# EAGLE board 0402-capacitor-shunt (EAGLE 9.4.1)
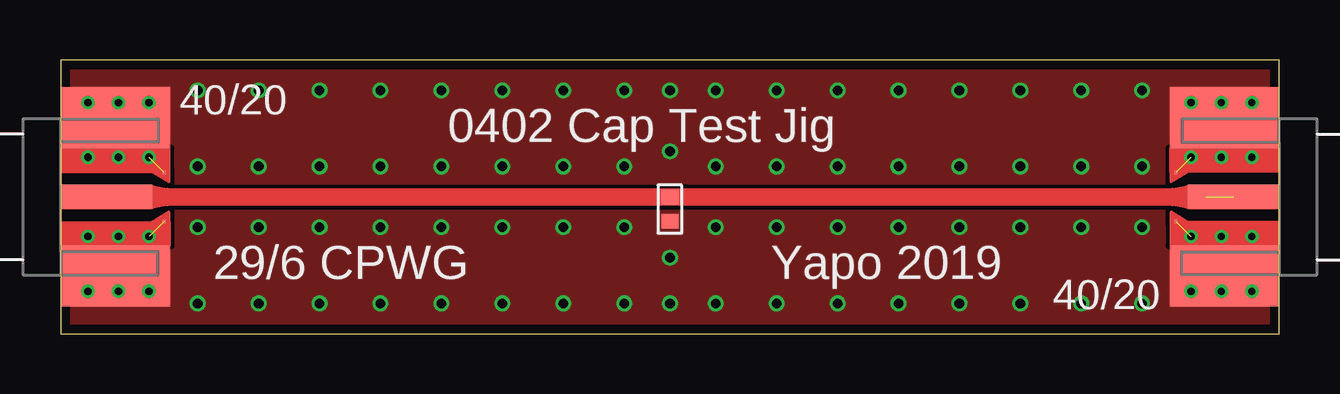
[diagram p0: board, top side]
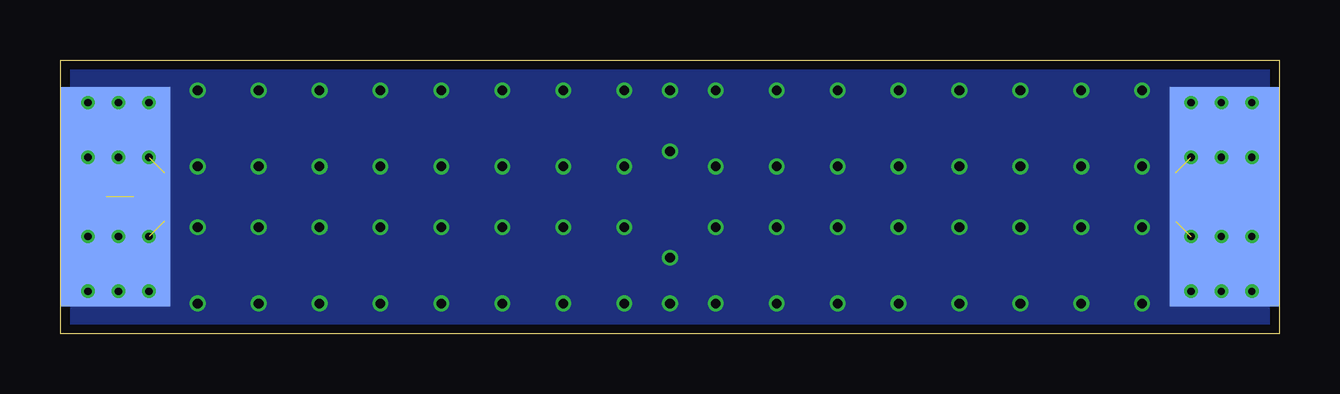
[diagram p1: board, bottom side, seen from below]

Size 50.8 x 11.43 mm. Coordinates in mm from the lower left corner, seen from the top.
Outline: 0,0 50.8,0 50.8,11.43 0,11.43 0,0
Copper layers (1*16): Top 0.035559375mm / dielectric 1.6mm / Bottom 0.035559375mm
Design rules "oshpark-2layer *": minimum track width 6mil, minimum drill 10mil, track to track 6mil, track to pad 6mil, pad to pad 6mil, via to via 6mil, smd to smd 6mil, copper to edge 15mil, drill to drill 6mil, minimum pad ring 5mil, minimum via ring 5mil, stop-mask expansion 2.5mil, vias tented up to drill 20mil, thermal gap 10mil
Net classes: 1 29-6: width 0.737 mm, clearance 0.152 mm

## Footprints (pad centres in the part's own frame; a part is rotated, then mirrored left to right if it is on the bottom)
C0402 = smd 0.6 x 0.7: 1 -0.5,0; 2 0.5,0
SMA_EDGE_LAUNCH_2L_4020_TAPER = smd 4.572 x 9.144 bottom: BOTTOM_GND 2.286,0 | smd 3.81 x 1.016: CENTER@1 1.905,0 | drill 0.3: GND@1 1.143,3.937; GND@2 3.683,3.937; GND@3 1.143,1.651; GND@4 3.683,1.651; GND@5 1.143,-1.651; GND@6 3.683,-1.651; GND@7 1.143,-3.937; GND@8 3.683,-3.937; GND@14 2.413,3.937; GND@15 2.413,-3.937; GND@16 2.413,-1.651; GND@17 2.413,1.651 | smd 4.572 x 2.54: GND_PAD1 2.286,3.302; GND_PAD2 2.286,-3.302 | smd 0.127 x 0.127: P$1 4.318,1.016; P$2 4.318,-1.016

## Placement (x,y rotation side)
C1  [C0402]  25.4,5.21 90 top
J1  [SMA_EDGE_LAUNCH_2L_4020_TAPER]  0,5.71 0 top
J2  [SMA_EDGE_LAUNCH_2L_4020_TAPER]  50.8,5.71 180 top

## Library data of the parts
C1 = yapo
J1 J2 = sma_footprint_2l

## Nets
GND: C1.1 J1.BOTTOM_GND J1.GND@1 J1.GND@2 J1.GND@3 J1.GND@4 J1.GND@5 J1.GND@6 J1.GND@7 J1.GND@8 J1.GND@14 J1.GND@15 J1.GND@16 J1.GND@17 J1.GND_PAD1 J1.GND_PAD2 J1.P$1 J1.P$2 J2.BOTTOM_GND J2.GND@1 J2.GND@2 J2.GND@3 J2.GND@4 J2.GND@5 J2.GND@6 J2.GND@7 J2.GND@8 J2.GND@14 J2.GND@15 J2.GND@16 J2.GND@17 J2.GND_PAD1 J2.GND_PAD2 J2.P$1 J2.P$2
N$1 [29-6]: C1.2 J1.CENTER@1 J2.CENTER@1

## Tracks (layer width: path | path; a pad name or v marks a point on that pad's centre or on a via)
GND  (via drill 0.4)  (4 unrouted)
  other vias: 5.71,6.99 5.71,4.45 8.26,6.99 10.79,6.99 13.34,6.99 15.88,6.99 18.41,6.99 20.95,6.99 23.5,6.99 27.3,6.99 8.26,4.45 10.79,4.45 13.34,4.45 18.41,4.45 20.95,4.45 23.5,4.45 27.3,4.45 5.71,10.16 5.71,1.27 8.26,10.16 10.79,10.16 13.34,10.16 15.88,10.16 18.41,10.16 20.95,10.16 23.5,10.16 27.3,10.16 8.26,1.27 10.79,1.27 13.34,1.27 18.41,1.27 15.88,1.27 20.95,1.27 23.5,1.27 27.3,1.27 29.84,6.99 32.38,6.99 34.92,6.99 37.47,6.99 40.01,6.99 42.55,6.99 29.84,1.27 32.38,1.27 34.92,1.27 37.47,1.27 42.55,1.27 40.01,1.27 45.09,1.27 45.09,6.99 29.84,10.16 32.38,10.16 34.92,10.16 37.47,10.16 40.01,10.16 42.55,10.16 45.09,10.16 29.84,4.45 32.38,4.45 34.92,4.45 37.47,4.45 40.01,4.45 42.55,4.45 45.09,4.45 15.88,4.45 25.4,10.16 25.4,1.27 25.4,3.17 25.4,7.62
  pour Top (no thermals): 0,0 50.8,0 50.8,11.43 0,11.43
  pour Bottom (no thermals): 0,0 50.8,0 50.8,11.43 0,11.43
N$1  (1 unrouted)
  Top 0.737: J1.CENTER@1 C1.2 | 47.74,5.71 26.04,5.71 C1.2 | C1.2
  Top 0.775: 47.74,5.71 47.75,5.71

## Text on the board
tPlace: 0402 Cap Test Jig | 29/6 CPWG | Yapo 2019